# Altium PCB PCB  ver 1 10.14.21.PcbDoc (part 2 of 2)
Units mm, origin at the board's own origin, x right, y up, seen from the top; angles counter-clockwise.
Board outline 83.62 x 83.62 mm, 2 copper layers (Top Layer, Bottom Layer); 47 components, 37 nets, 165 pads, 21 vias.
Unrouted connection lines stored in the file: 3.
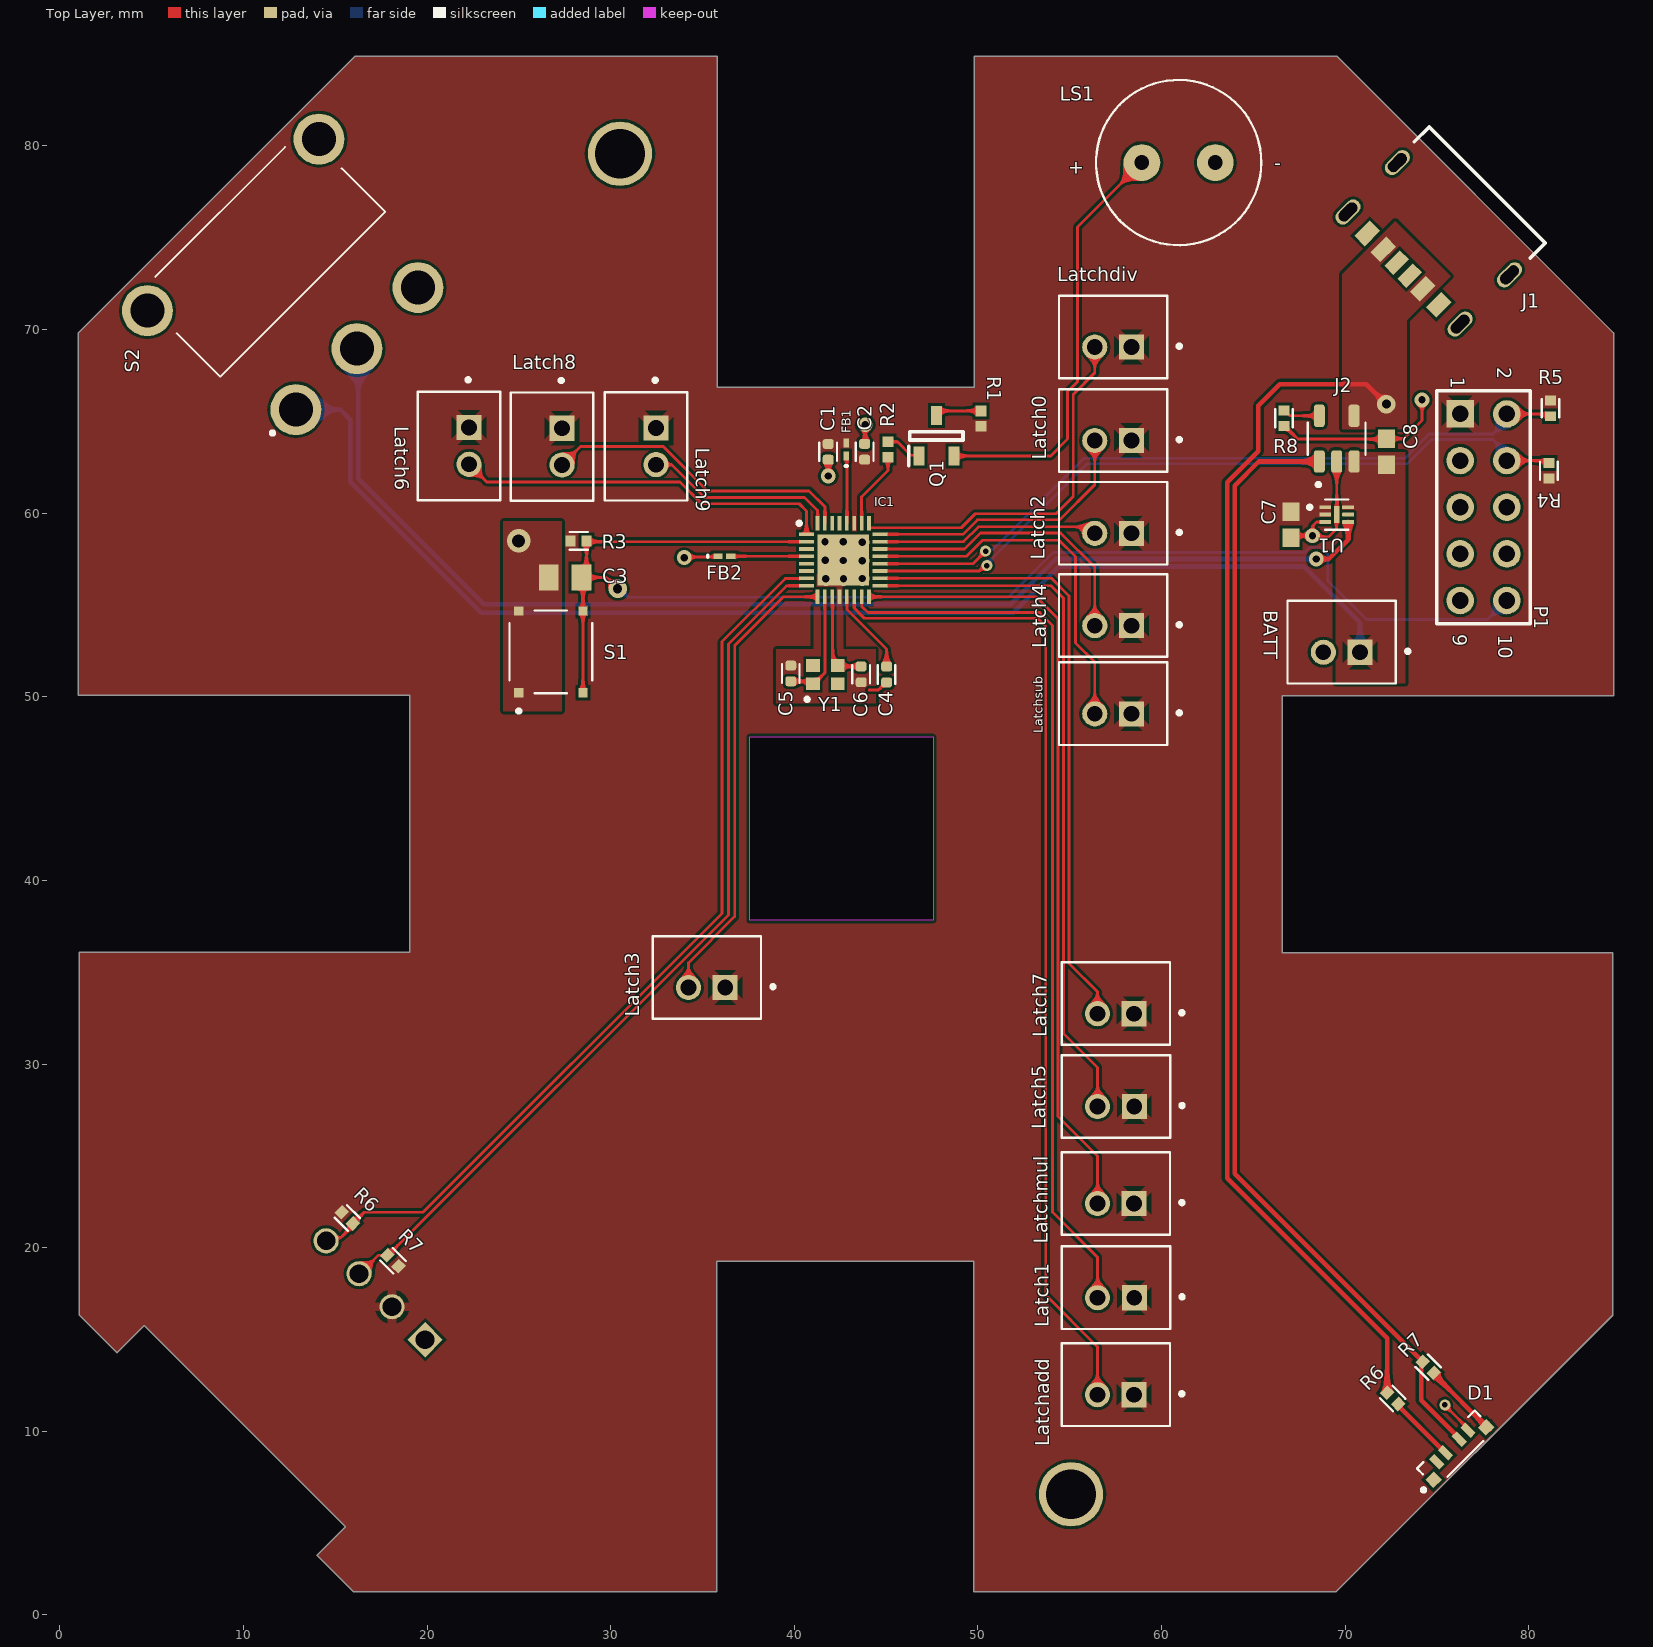
[diagram p0: Top Layer view]

## Via types
v1: diameter 0.8, hole 0.4, Top Layer to Bottom Layer, tented both sides, 15 vias
v2: diameter 0.6, hole 0.3, Top Layer to Bottom Layer, tented both sides, 3 vias
v3: diameter 1, hole 0.5, Top Layer to Bottom Layer, tented both sides, 2 vias
v4: diameter 1.27, hole 0.711, Top Layer to Bottom Layer, tented both sides, 1 vias

## Nets (pads, with @x,y where several pads share a name; then routed paths per layer and width w, separated by ;. In a path a pad name is that pad's centre, name@x,y a point inside that pad or via, vN(x,y) a via of type N, cw(c..) or ccw(c..) an arc to the next point about the centre after c; other vN are vias at no path point) (continued)
Latchmul: (continued)
  Top Layer w0.15: IC1.16 53.168,55.448 54.366,54.251 54.366,27.149 56.522,24.993 Latchmul.2@56.522,22.403
Latchsub: IC1.21 Latchsub.2 | length 20.7
  Top Layer w0.15: IC1.21 49.368,57.648 50.241,58.522 54.419,58.522 ; 54.432,58.522 55.321,57.633 55.321,52.934 56.369,51.886 Latchsub.2@56.369,48.768
NetBATT_1: BATT.1 C8.2 J2.3 S2.1 U1.6 | length 68.4
  Bottom Layer w0.254: S2.1 15.287,65.638 15.824,65.1 15.824,61.722 22.962,54.585 51.918,54.585 54.432,57.099 67.742,57.099 70.815,54.026 BATT.1
NetC4_2: C4.2 IC1.13 | length 4.7
  Top Layer w0.15: IC1.13 42.869,54.76 45.03,52.599 C4.2
NetC5_1: C5.1 IC1.10 Y1.1 | length 6.3
  Top Layer w0.15: C5.1 40.899,50.84 Y1.1 41.3,50.989 41.349,50.989 41.669,51.308 IC1.10
NetC6_1: C6.1 IC1.11 Y1.3 | length 5.1
  Top Layer w0.15: IC1.11 42.09,55.427 42.09,51.989 42.365,51.714 Y1.3 ; Y1.3@42.385,51.714 42.441,51.658 C6.1@43.639,51.658
NetD1_3: D1.3 R6.2@72.897,11.482 | length 3.8
  Top Layer w0.254: R6.2@72.897,11.482 72.897,11.392 D1.3 ; D1.3@75.598,8.692 D1.3@75.646,8.692
NetD1_4: D1.4 J2.1 R7.1@74.22,13.791 | length 62.2
  Top Layer w0.254: J2.1 65.303,62.814 63.983,61.493 63.983,24.028 74.22,13.791 74.22,13.589 74.143,13.512 74.143,11.694 D1.4@76.24,9.597
NetD1_6: D1.6 R7.2@74.828,13.183 | length 4.4
  Top Layer w0.254: R7.2@74.828,13.183 74.828,13.116 D1.6@77.863,10.081
NetFB1_1: FB1.1 IC1.28 | length 3.7
  Top Layer w0.15: FB1.1 42.869,63.085 IC1.28
NetFB2_2: FB2.2 IC1.4 | length 4.1
  Top Layer w0.15: FB2.2 IC1.4
NetIC1_19: IC1.19 P1.4 R4.1 | length 40.2
  Top Layer w0.15: IC1.19 50.072,56.848 50.373,57.15 v2(50.495,57.15) ; P1.4 80.968,62.864 R4.1
  Bottom Layer w0.15: v2(50.495,57.15) 50.495,57.252 55.931,62.687 73.38,62.687 74.701,64.008 78.054,64.008 78.808,63.254 P1.4
NetIC1_20: IC1.20 P1.2 R5.1 | length 40.1
  Top Layer w0.15: IC1.20 49.73,57.248 v2(50.419,57.937) ; P1.2 81.062,65.404 R5.1
  Bottom Layer w0.15: v2(50.419,57.937) 50.488,58.006 50.793,58.006 55.778,62.992 73.254,62.992 74.574,64.313 78.054,64.313 78.808,65.067 P1.2
NetIC1_26: IC1.26 R2.1 | length 4.2
  Top Layer w0.15: IC1.26 43.669,60.89 45.104,62.325 R2.1
NetJ2_5: J2.5 R8.1 | length 2
  Top Layer w0.15: R8.1 66.706,65.599 67.001,65.304 J2.5
NetLS1_P: LS1.P Q1.2 | length 23.3
  Top Layer w0.15: Q1.2 53.971,63.115 54.889,64.033 54.889,66.624 55.423,67.158 55.423,75.584 LS1.P
NetQ1_1: Q1.1 R2.2 | length 2
  Top Layer w0.15: R2.2 45.614,63.888 46.352,63.15 46.754,63.15 Q1.1
NetQ1_3: Q1.3 R1.1 | length 2.5
  Top Layer w0.15: Q1.3 47.739,65.346 47.964,65.571 R1.1@50.16,65.571
NetS2_2: S2.2 U1.4 | length 66.3
  Top Layer w0.254: v1(68.428,57.506) 69.12,57.506 70.17,58.556 U1.4
  Bottom Layer w0.254: S2.2 16.256,68.885 16.256,61.874 23.089,55.042 51.791,55.042 54.254,57.506 v1(68.428,57.506)
nRST: C3.2 IC1.2 P1.10 R3.1 S1.3 S1.4 | length 75.3
  Top Layer w0.15: S1.3 S1.4 28.494,56.418 C3.2 ; v3(30.378,55.88) 29.762,56.496 C3.2 ; IC1.2 28.732,58.448 R3.1 28.686,56.766 C3.2
  Bottom Layer w0.15: v3(30.378,55.88) 30.489,55.88 30.947,55.423 51.662,55.423 54.096,57.858 67.789,57.858 68.072,58.141 68.684,58.141 69.063,57.762 69.063,56.312 71.171,54.204 77.768,54.204 P1.10
SCL: IC1.8 LCD1.03 R7.1@17.84,19.588 | length 49.3
  Top Layer w0.15: LCD1.03@15.957,18.109 LCD1.03@16.408,18.109 ; LCD1.03@16.063,18.317 LCD1.03@16.297,18.55 ; LCD1.03 16.353,18.576 17.365,19.588 17.521,19.588 17.543,19.566 17.818,19.566 R7.1@17.84,19.588 ; R7.1@17.887,19.588 36.42,38.121 36.42,52.878 39.585,56.044 IC1.8@40.664,56.044
SDA: IC1.7 LCD1.04 R6.1@15.965,21.316 | length 50.2
  Top Layer w0.15: LCD1.04@14.267,20.113 14.703,20.548 15.316,20.548 15.965,21.197 15.965,21.316 16.573,21.924 19.791,21.924 36.068,38.202 36.068,53.001 39.515,56.448 IC1.7
VCC: C1.2 C2.2 C7.2 FB1.2 IC1.27 Latch0.1 Latch1.1 Latch2.1 Latch3.1 Latch4.1 Latch5.1 Latch6.1 Latch7.1 Latch8.1 Latch9.1 Latchadd.1 Latchdiv.1 Latchmul.1 Latchsub.1 LCD1.02 P1.1 R1.2 R3.2 R4.2 R5.2 R6.2@15.357,21.924 R7.2@18.448,18.98 U1.1 U1.2
pads on no net: D1.1 D1.2 IC1.3 IC1.5 IC1.6 IC1.29 IC1.30 J1.A5 J1.B5 P1.6 P1.7 P1.8 U1.5 Y1.2 Y1.4

## Polygon pours and split planes (outlines as drawn)
VCC on Top Layer "VCC_L01_P012" (solid, pour order 12): 14.005,3.241 15.559,4.795 4.597,15.757 3.115,14.275 1.065,16.325 1.065,36.075 19.065,36.075 19.065,50.075 1.011,50.075 1.011,69.825 16.066,84.88 35.816,84.88 35.816,66.86 49.816,66.86 49.816,84.88 69.566,84.88 69.573,84.873 84.627,69.818 84.627,50.068 66.573,50.068 66.573,36.068 84.573,36.068 84.573,16.318 69.519,1.264 49.769,1.264 49.769,19.264 35.769,19.264 35.769,1.264 15.983,1.264
GND on Top Layer "GND_L01_P005" (solid, pour order 5): 24.155,59.563 27.33,59.563 27.33,49.225 24.155,49.225
GND on Top Layer "GND_L01_P006" (solid, pour order 6): 41.069,56.667 42.669,56.667 42.669,52.578 44.45,52.578 44.45,49.657 39.014,49.657 39.014,52.578 41.069,52.578
+5 on Top Layer "+5_L01_P007" (solid, pour order 7): 72.733,75.908 69.85,73.025 69.85,64.567 73.355,64.567 73.355,70.51 75.743,72.898
NetBATT_1 on Top Layer "NETBATT_1_L01_P008" (solid, pour order 8): 69.499,63.322 73.279,63.322 73.279,50.726 69.499,50.726
GND on Bottom Layer "GND_L02_P013" (solid, pour order 13): 14.005,3.241 15.559,4.795 4.597,15.757 3.115,14.275 1.065,16.325 1.065,36.075 19.065,36.075 19.065,50.075 1.011,50.075 1.011,69.825 16.066,84.88 35.816,84.88 35.816,66.86 49.816,66.86 49.816,84.88 69.566,84.88 69.573,84.873 84.627,69.818 84.627,50.068 66.573,50.068 66.573,36.068 84.573,36.068 84.573,16.318 69.519,1.264 49.769,1.264 49.769,19.264 35.769,19.264 35.769,1.264 15.983,1.264

## Silkscreen, mask and mechanical layers (free items; w line width, h text height)
Mechanical 1:
  lines w0.254: 57.252,1.283 57.271,1.264 ; 1.011,50.075 1.011,69.825 16.066,84.88 35.816,84.88 35.816,66.86 49.816,66.86 49.816,84.88 69.566,84.88 69.573,84.873 84.627,69.818 84.627,50.068 66.573,50.068 66.573,36.068 84.573,36.068 84.573,16.318 69.519,1.264 49.769,1.264 49.769,19.264 35.769,19.264 35.769,1.264 15.983,1.264 14.005,3.241 15.559,4.795 4.597,15.757 3.115,14.275 1.065,16.325 1.065,36.075 19.065,36.075 19.065,50.075 1.011,50.075 ; 37.565,37.818 37.565,47.818 47.565,47.818 47.565,37.818 37.565,37.818

## Text inside footprints (layer, text, board x,y; h text height)
LS1: Top Overlay "+" at 54.935,78.496 h0.75; Top Overlay "-" at 66.135,78.696 h0.75; Mechanical 13 "+" at 54.935,78.496 h0.75; Mechanical 13 "-" at 66.135,78.696 h0.75
P1: Top Overlay "2" at 78.3,67.944 h0.75 r270; Top Overlay "1" at 75.76,67.436 h0.75 r270; Top Overlay "9" at 75.87,53.416 h0.75 r270; Top Overlay "10" at 78.334,53.365 h0.75 r270